# EAGLE board PiezoAmpHVDCv3 (EAGLE 7.1.0)
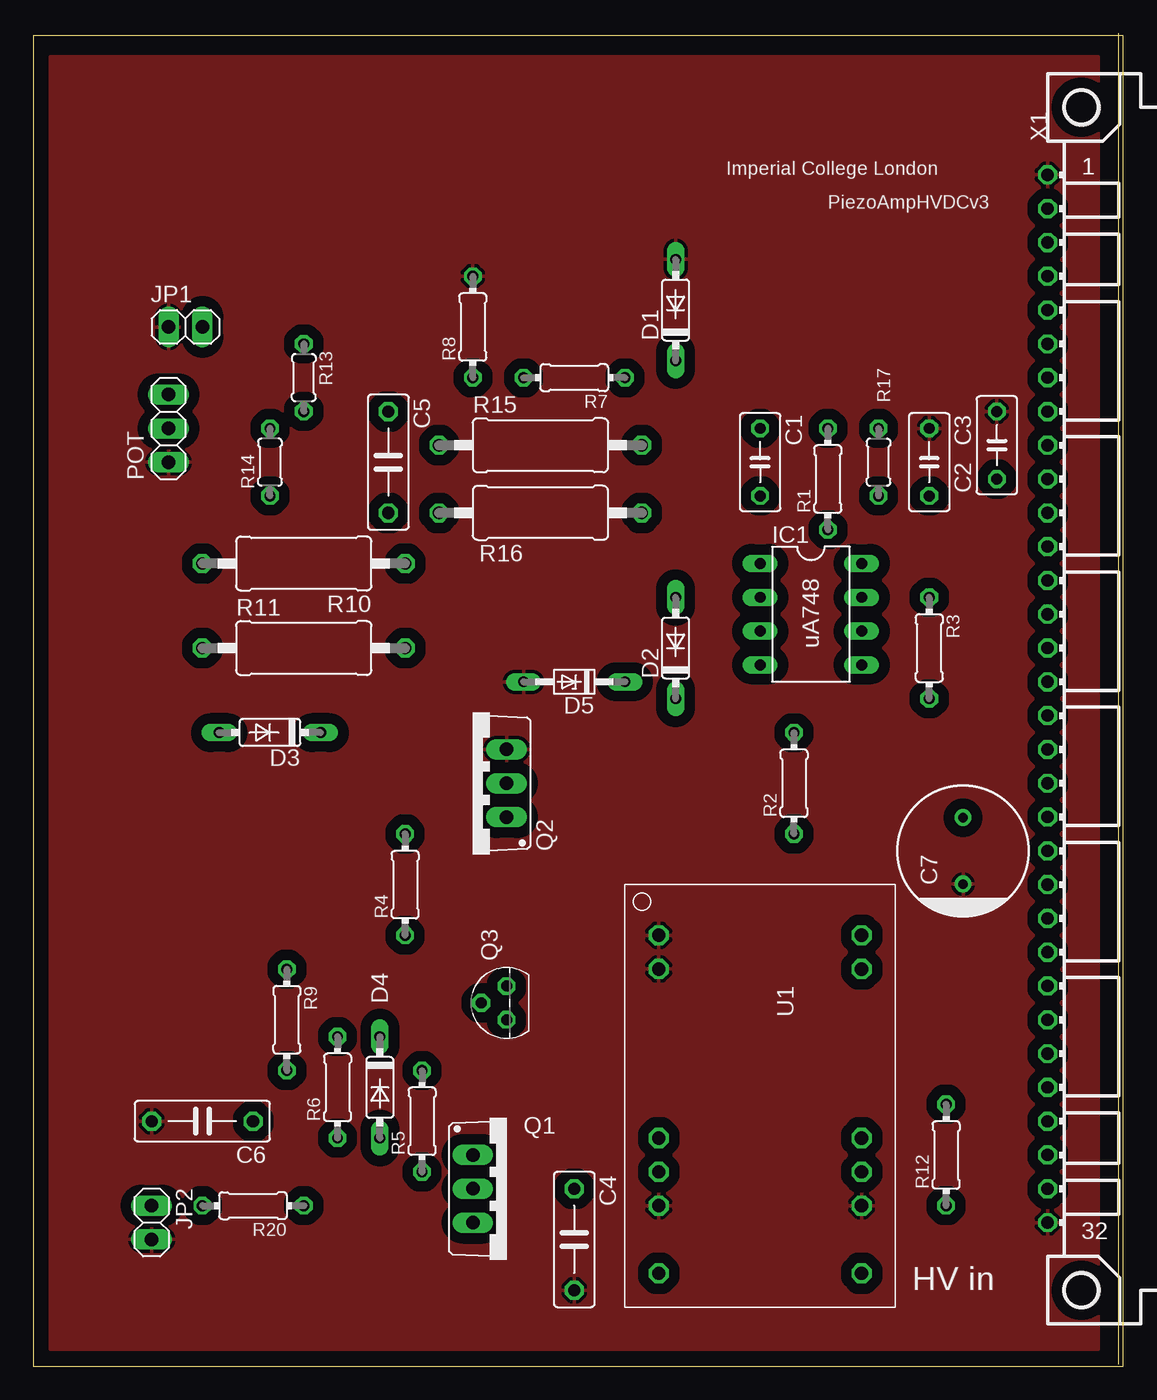
[diagram p0: board, top side]
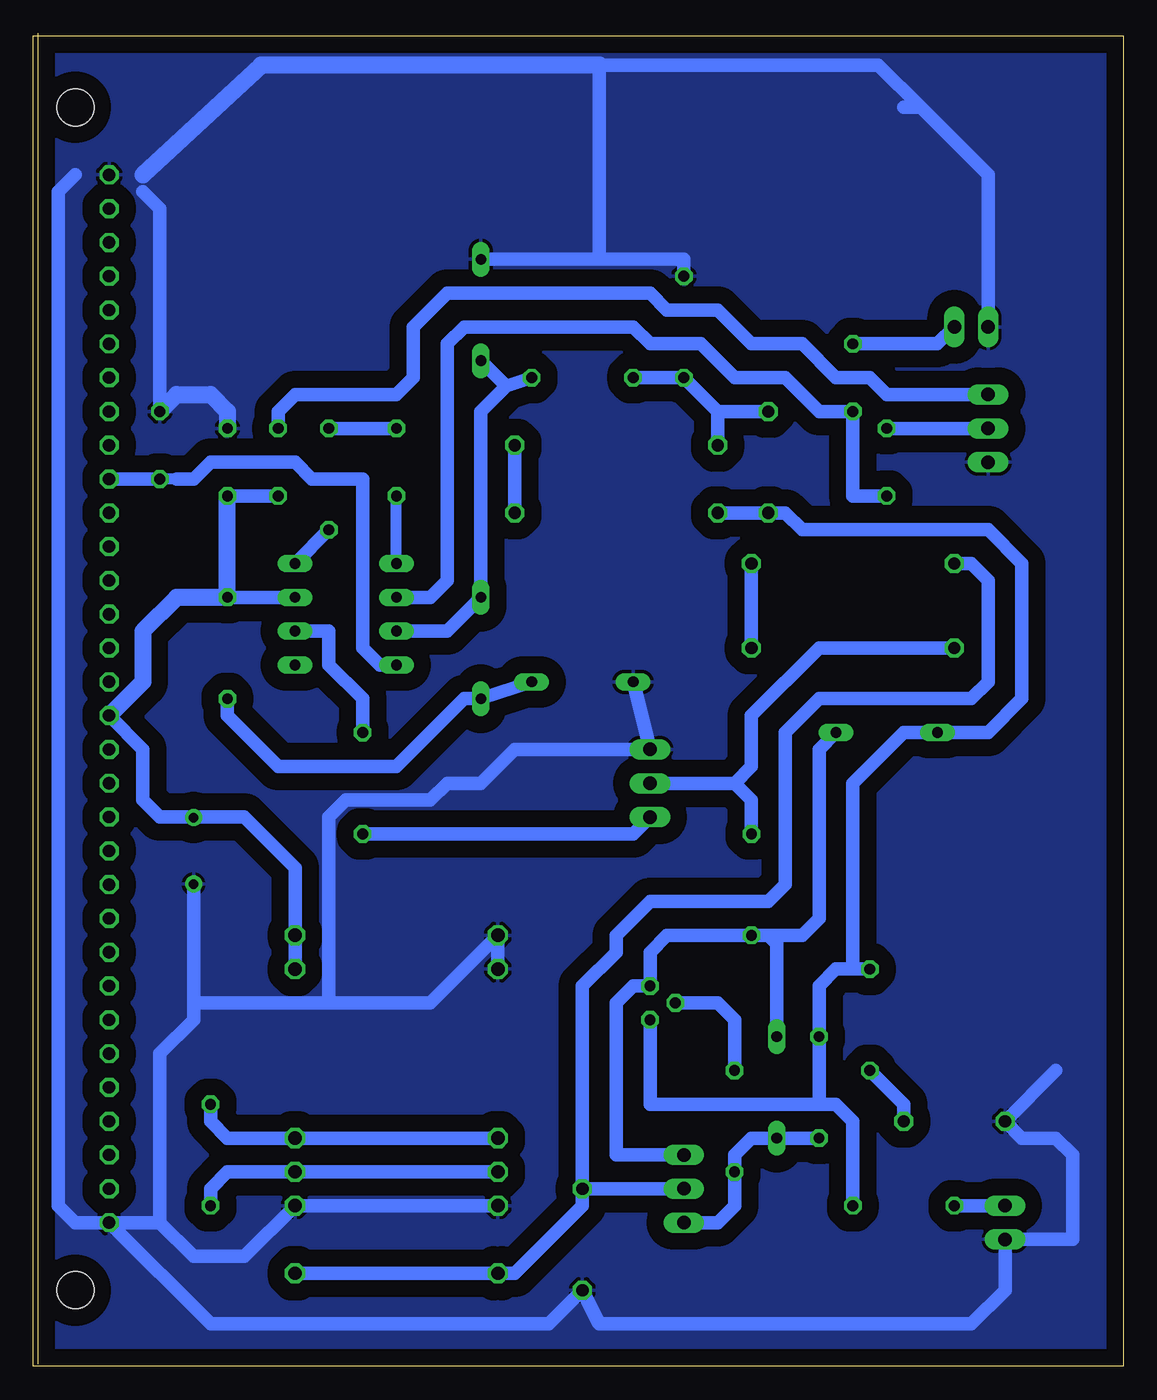
[diagram p1: board, bottom side, seen from below]

Size 81.9 x 100 mm. Coordinates in mm from the lower left corner, seen from the top.
Outline: 0,0 81.9,0 81.9,100 0,100 0,0
Copper layers (1*16): Top 0.035mm / dielectric 1.5mm / Bottom 0.035mm
Design rules "dirt_cheap_dirty_boards.v1": minimum track width 5mil, minimum drill 12mil, track to track 5mil, track to pad 5mil, pad to pad 5mil, via to via 5mil, smd to smd 0mil, copper to edge 10mil, drill to drill 10mil, minimum pad ring 10mil, minimum via ring 6mil, stop-mask expansion 2mil, vias tented up to drill 25mil, thermal gap 10mil

## Footprints (pad centres in the part's own frame; a part is rotated, then mirrored left to right if it is on the bottom)
C050-030X075 = drill 0.813 octagon: 1 -2.54,0; 2 2.54,0
C075-032X103 = drill 0.914 octagon: 1 -3.81,0; 2 3.81,0
SANYO-OSCON_F8 = drill 0.7 pad 1.27: + 2.5,0; - -2.5,0
DO35-7 = drill 0.813 long: A 3.81,0; C -3.81,0
DO34Z7 = drill 0.813 long: A 3.81,0; C -3.81,0
DIL08 = drill 0.813 long: 1 -3.81,-3.81; 2 -1.27,-3.81; 3 1.27,-3.81; 4 3.81,-3.81; 5 3.81,3.81; 6 1.27,3.81; 7 -1.27,3.81; 8 -3.81,3.81
1X02 = drill 1.016 long: 1 -1.27,0; 2 1.27,0
1X03 = drill 1.016 long: 1 -2.54,0; 2 0,0; 3 2.54,0
TO220BV = drill 1.016 long: D 0,-2.54; G -2.54,-2.54; S 2.54,-2.54
TO92 = drill 0.813 octagon: 1 1.27,0; 2 0,1.905; 3 -1.27,0
0204/7 = drill 0.813 octagon: 1 -3.81,0; 2 3.81,0
0411/15 = drill 0.914 octagon: 1 -7.62,0; 2 7.62,0
0204/5 = drill 0.813 octagon: 1 -2.54,0; 2 2.54,0
RXXDIP = drill 1 octagon: 2 -12.7,-7.62; 3 -10.16,-7.62; 8 2.54,-7.62; 9 5.08,-7.62; 10 7.62,-7.62; 12 12.7,-7.62; 13 12.7,7.62; 15 7.62,7.62; 16 5.08,7.62; 17 2.54,7.62; 22 -10.16,7.62; 23 -12.7,7.62
MAB32 = drill 0.914 octagon: A1 -2.54,39.37; A2 -2.54,36.83; A3 -2.54,34.29; A4 -2.54,31.75; A5 -2.54,29.21; A6 -2.54,26.67; A7 -2.54,24.13; A8 -2.54,21.59; A9 -2.54,19.05; A10 -2.54,16.51; A11 -2.54,13.97; A12 -2.54,11.43; A13 -2.54,8.89; A14 -2.54,6.35; A15 -2.54,3.81; A16 -2.54,1.27; A17 -2.54,-1.27; A18 -2.54,-3.81; A19 -2.54,-6.35; A20 -2.54,-8.89; A21 -2.54,-11.43; A22 -2.54,-13.97; A23 -2.54,-16.51; A24 -2.54,-19.05; A25 -2.54,-21.59; A26 -2.54,-24.13; A27 -2.54,-26.67; A28 -2.54,-29.21; A29 -2.54,-31.75; A30 -2.54,-34.29; A31 -2.54,-36.83; A32 -2.54,-39.37 | hole 2.794: 0,44.45; 0,-44.45

## Placement (x,y rotation side)
C1  180pF  [C050-030X075]  54.61,67.94 270 top
C2  0.1u  [C050-030X075]  72.39,69.21 90 top
C3  0.1u  [C050-030X075]  67.31,67.94 270 top
C4  4700/250V  [C075-032X103]  40.64,9.53 270 top
C5  10pF/250V  [C075-032X103]  26.67,67.94 270 top
C6  470/250V  [C075-032X103]  12.7,18.41 180 top
C7  47u/16V  [SANYO-OSCON_F8]  69.85,38.73 90 top
D1  1N4148  [DO35-7]  48.26,79.38 90 top
D2  1N4148  [DO35-7]  48.26,53.98 90 top
D3  1N4148  [DO35-7]  17.78,47.62 180 top
D4  1N4148  [DO35-7]  26.03,20.95 270 top
D5  [DO34Z7]  40.64,51.44 180 top
IC1  LM101N  [DIL08]  58.42,56.52 270 top
JP1  In  [1X02]  11.43,78.1 0 top
JP2  HV Out  [1X02]  8.89,10.79 270 top
POT  10k  [1X03]  10.16,70.48 90 top
Q1  IRFU214  [TO220BV]  35.56,13.34 270 top
Q2  IRFU214  [TO220BV]  33.02,43.82 90 top
Q3  2N3904  [TO92]  35.56,27.3 90 top
R1  5.1k  [0204/7]  59.69,66.67 90 top
R2  180  [0204/7]  57.15,43.82 90 top
R3  3.3k  [0204/7]  67.31,53.98 270 top
R4  180  [0204/7]  27.94,36.2 90 top
R5  180  [0204/7]  29.21,18.41 90 top
R6  39  [0204/7]  22.86,20.95 90 top
R7  470  [0204/7]  40.64,74.3 180 top
R8  10k  [0204/7]  33.02,78.1 90 top
R9  750  [0204/7]  19.05,26.04 270 top
R10  22k/1W  [0411/15]  20.32,60.33 180 top
R11  22k/1W  [0411/15]  20.32,53.98 0 top
R12  5k  [0204/7]  68.58,15.88 90 top
R13  100k  [0204/5]  20.32,74.3 270 top
R14  100k  [0204/5]  17.78,67.94 90 top
R15  120k/1/4W  [0411/15]  38.1,69.21 0 top
R16  120k/1/4W  [0411/15]  38.1,64.13 180 top
R17  4k7  [0204/5]  63.5,67.94 270 top
R20  3.3k  [0204/7]  16.51,12.06 180 top
U1  RXX100  [RXXDIP]  54.61,19.68 270 top
X1  MAB32  [MAB32]  78.74,50.16 0 top

## Library data of the parts
C1-C7 R1-R17 R20 = rcl
D1-D5 = diode
IC1 = linear
JP1 JP2 POT = pinhead
Q1 Q2 = transistor-power
Q3 = transistor-npn
U1 = custom_parts
X1 = con-vg

## Nets
+15V: C3.2 C7.+ IC1.7 R3.1 R17.2 U1.22 U1.23 X1.A17
-15V: C2.1 IC1.4 X1.A10
GND: C2.2 C3.1 C4.2 C6.2 C7.- D1.A D5.A JP1.1 JP2.2 POT.1 Q2.S R8.2 U1.2 U1.3 U1.10 U1.15 X1.A1 X1.A32
HV: C4.1 Q1.D R10.2 U1.12 U1.13
N$1: JP1.2 R13.1
N$2: R10.1 R11.2
N$3: Q2.G R2.1
N$4: Q2.D R4.2 R11.1
N$5: C6.1 R9.2
N$6: R12.2 U1.8 U1.17
N$7: IC1.8 R1.1
N$8: IC1.6 R2.2
N$9: R12.1 U1.9 U1.16
N$10: IC1.2 R13.2 R14.1
N$11: D3.C D4.C Q1.G Q3.1 R4.1
N$12: D4.A Q1.S R5.1 R6.1
N$13: POT.2 R14.2
N$14: Q3.2 R5.2
N$15: C5.2 D3.A Q3.3 R6.2 R9.1 R16.2 R20.1
N$17: POT.3 R17.1
N$19: R15.2 R16.1
N$20: C5.1 R7.2 R8.1 R15.1
N$21: D1.C D2.A IC1.3 R7.1
N$23: D2.C D5.C R3.2
N$25: JP2.1 R20.2
N$26: C1.1 R1.2
N$27: C1.2 IC1.1

## Tracks (layer width: path | path; a pad name or v marks a point on that pad's centre or on a via)
+15V
  Bottom 1.016: IC1.7 R3.1 | U1.22 U1.23 62.23,37.47 66.04,41.27 69.81,41.27 C7.+ 69.89,41.27 72.39,41.27 73.66,42.55 73.66,46.36 X1.A17 | C3.2 R17.2
  Bottom 1.27: X1.A17 73.66,51.44 73.66,55.25 71.12,57.79 R3.1 C3.2
-15V
  Bottom 0.813: 71.12,66.67 C2.1
  Bottom 1.016: IC1.4 55.88,52.71 57.15,53.98 57.15,66.67 60.96,66.67 62.23,67.94 68.58,67.94 69.85,66.67 71.12,66.67 | C2.1 X1.A10
GND
  Bottom 1.016: C2.2 72.39,86.99 73.66,88.27 | U1.10 U1.15 66.04,8.26 69.85,8.26 72.39,10.79 | U1.3 U1.2 52.07,27.3 59.69,27.3 | 5.08,22.22 C6.2 7.62,17.14 5.08,17.14 3.81,15.88 3.81,9.53 JP2.2 8.89,5.71 11.43,3.17 39.37,3.17 C4.2 43.18,3.17 68.58,3.17 X1.A32 | D5.A Q2.S 45.72,46.36 48.26,43.82 50.8,43.82 52.07,42.55 58.42,42.55 59.69,41.27 59.69,27.3 | X1.A32 78.74,10.79 80.01,12.06 80.01,88.27 78.74,89.53 | 15.24,94.61 10.16,89.53 JP1.1 | 15.24,94.61 18.42,97.79 39.37,97.79 39.37,83.18 | 59.69,27.3 69.85,27.3 | 69.85,27.3 C7.- | X1.A32 72.39,10.79 | 69.85,27.3 69.85,26.04 72.39,23.49 72.39,10.79 | D1.A 39.37,83.18 | 39.37,83.18 33.02,83.18 R8.2 | 15.24,94.61 16.51,94.61
  Bottom 1.27: 39.37,97.79 64.77,97.79 73.66,89.53 | C3.1 67.31,71.75 68.58,73.02 71.12,73.02 C2.2
  pour Bottom (isolate 1.27): 81.28,99.69 1.27,99.69 1.27,0.64 81.28,0.64
  pour Top (isolate 0.813): 1.27,98.42 80.01,98.42 80.01,1.27 1.27,1.27
HV
  Bottom 1.016: U1.13 U1.12 45.72,6.99 40.64,12.06 C4.1 | C4.1 40.64,28.57 38.1,31.11 38.1,32.39 35.56,34.93 26.67,34.93 25.4,36.2 25.4,47.62 22.86,50.16 11.43,50.16 10.16,51.44 10.16,59.05 11.43,60.33 R10.2 | C4.1 Q1.D
N$1
  Bottom 1.016: R13.1 13.97,76.83 JP1.2
N$2
  Bottom 1.016: R10.1 R11.2
N$3
  Bottom 1.016: R2.1 36.83,40.01 Q2.G
N$4
  Bottom 1.016: Q2.D 29.21,43.82 | R4.2 27.94,42.55 29.21,43.82 | R11.1 22.86,53.98 27.94,48.9 27.94,45.09 29.21,43.82
N$5
  Bottom 1.016: C6.1 16.51,19.68 R9.2
N$6
  Bottom 1.016: U1.8 U1.17 67.31,17.14 68.58,18.41 R12.2
N$7
  Bottom 1.016: IC1.8 R1.1
N$8
  Bottom 1.016: IC1.6 59.69,55.25 59.69,52.71 57.15,50.16 R2.2
N$9
  Bottom 1.016: U1.9 U1.16 67.31,14.61 68.58,13.34 R12.1
N$10
  Bottom 1.016: R14.1 20.32,65.41 R13.2 22.86,71.75 25.4,74.3 29.21,74.3 31.75,76.83 35.56,76.83 36.83,78.1 49.53,78.1 50.8,76.83 50.8,59.05 52.07,57.79 IC1.2
N$11
  Bottom 1.016: 26.67,32.39 R4.1 34.29,32.39 35.56,31.11 Q3.1 36.83,28.57 38.1,27.3 38.1,15.88 Q1.G | 26.67,32.39 24.13,32.39 22.86,33.66 22.86,46.36 D3.C | D4.C 26.03,31.75 26.67,32.39
N$12
  Bottom 1.016: R6.1 D4.A 27.94,17.14 29.21,15.88 R5.1 29.21,12.06 30.48,10.79 Q1.S
N$13
  Bottom 1.016: POT.2 R14.2
N$14
  Bottom 1.016: Q3.2 30.48,27.3 29.21,26.04 R5.2
N$15
  Bottom 1.016: Q3.3 35.56,19.68 22.86,19.68 | 22.86,19.68 R6.2 22.86,28.57 21.59,29.84 20.32,29.84 | 20.32,29.84 20.32,43.82 16.51,47.62 D3.A 10.16,47.62 7.62,50.16 7.62,60.33 10.16,62.87 24.13,62.87 25.4,64.13 C5.2 R16.2 | 20.32,29.84 R9.1 | 22.86,19.68 21.59,19.68 20.32,18.41 R20.1
N$17
  Bottom 1.016: R17.1 63.5,71.75 62.23,73.02 54.61,73.02 53.34,74.3 53.34,78.1 50.8,80.64 35.56,80.64 34.29,79.38 30.48,79.38 27.94,76.83 24.13,76.83 21.59,74.3 19.05,74.3 17.78,73.02 POT.3
N$19
  Bottom 1.016: R15.2 R16.1
N$20
  Bottom 1.016: R7.2 R8.1 30.48,71.75 | 30.48,71.75 C5.1 | R15.1 30.48,71.75
N$21
  Bottom 1.016: R7.1 46.36,73.66 | 46.36,73.66 D1.C | 46.36,73.66 48.26,71.75 D2.A 50.8,55.25 IC1.3
N$23
  Bottom 1.016: R3.2 67.31,48.9 63.5,45.09 54.61,45.09 49.53,50.16 D2.C D5.C
N$25
  Bottom 1.016: R20.2 JP2.1
N$26
  Bottom 1.016: C1.1 R1.2
N$27
  Bottom 0.813: IC1.1 C1.2

## Text on the board
tPlace: Imperial College London | PiezoAmpHVDCv3 | uA748 | HV in